# Altium PCB GATEWAY_PCB.PcbDoc (part 1 of 2)
Units mm, origin at the board's own origin, x right, y up, seen from the top; angles counter-clockwise.
Board outline 96.14 x 95.25 mm, 2 copper layers (Top Layer, Bottom Layer); 203 components, 123 nets, 653 pads, 432 vias.
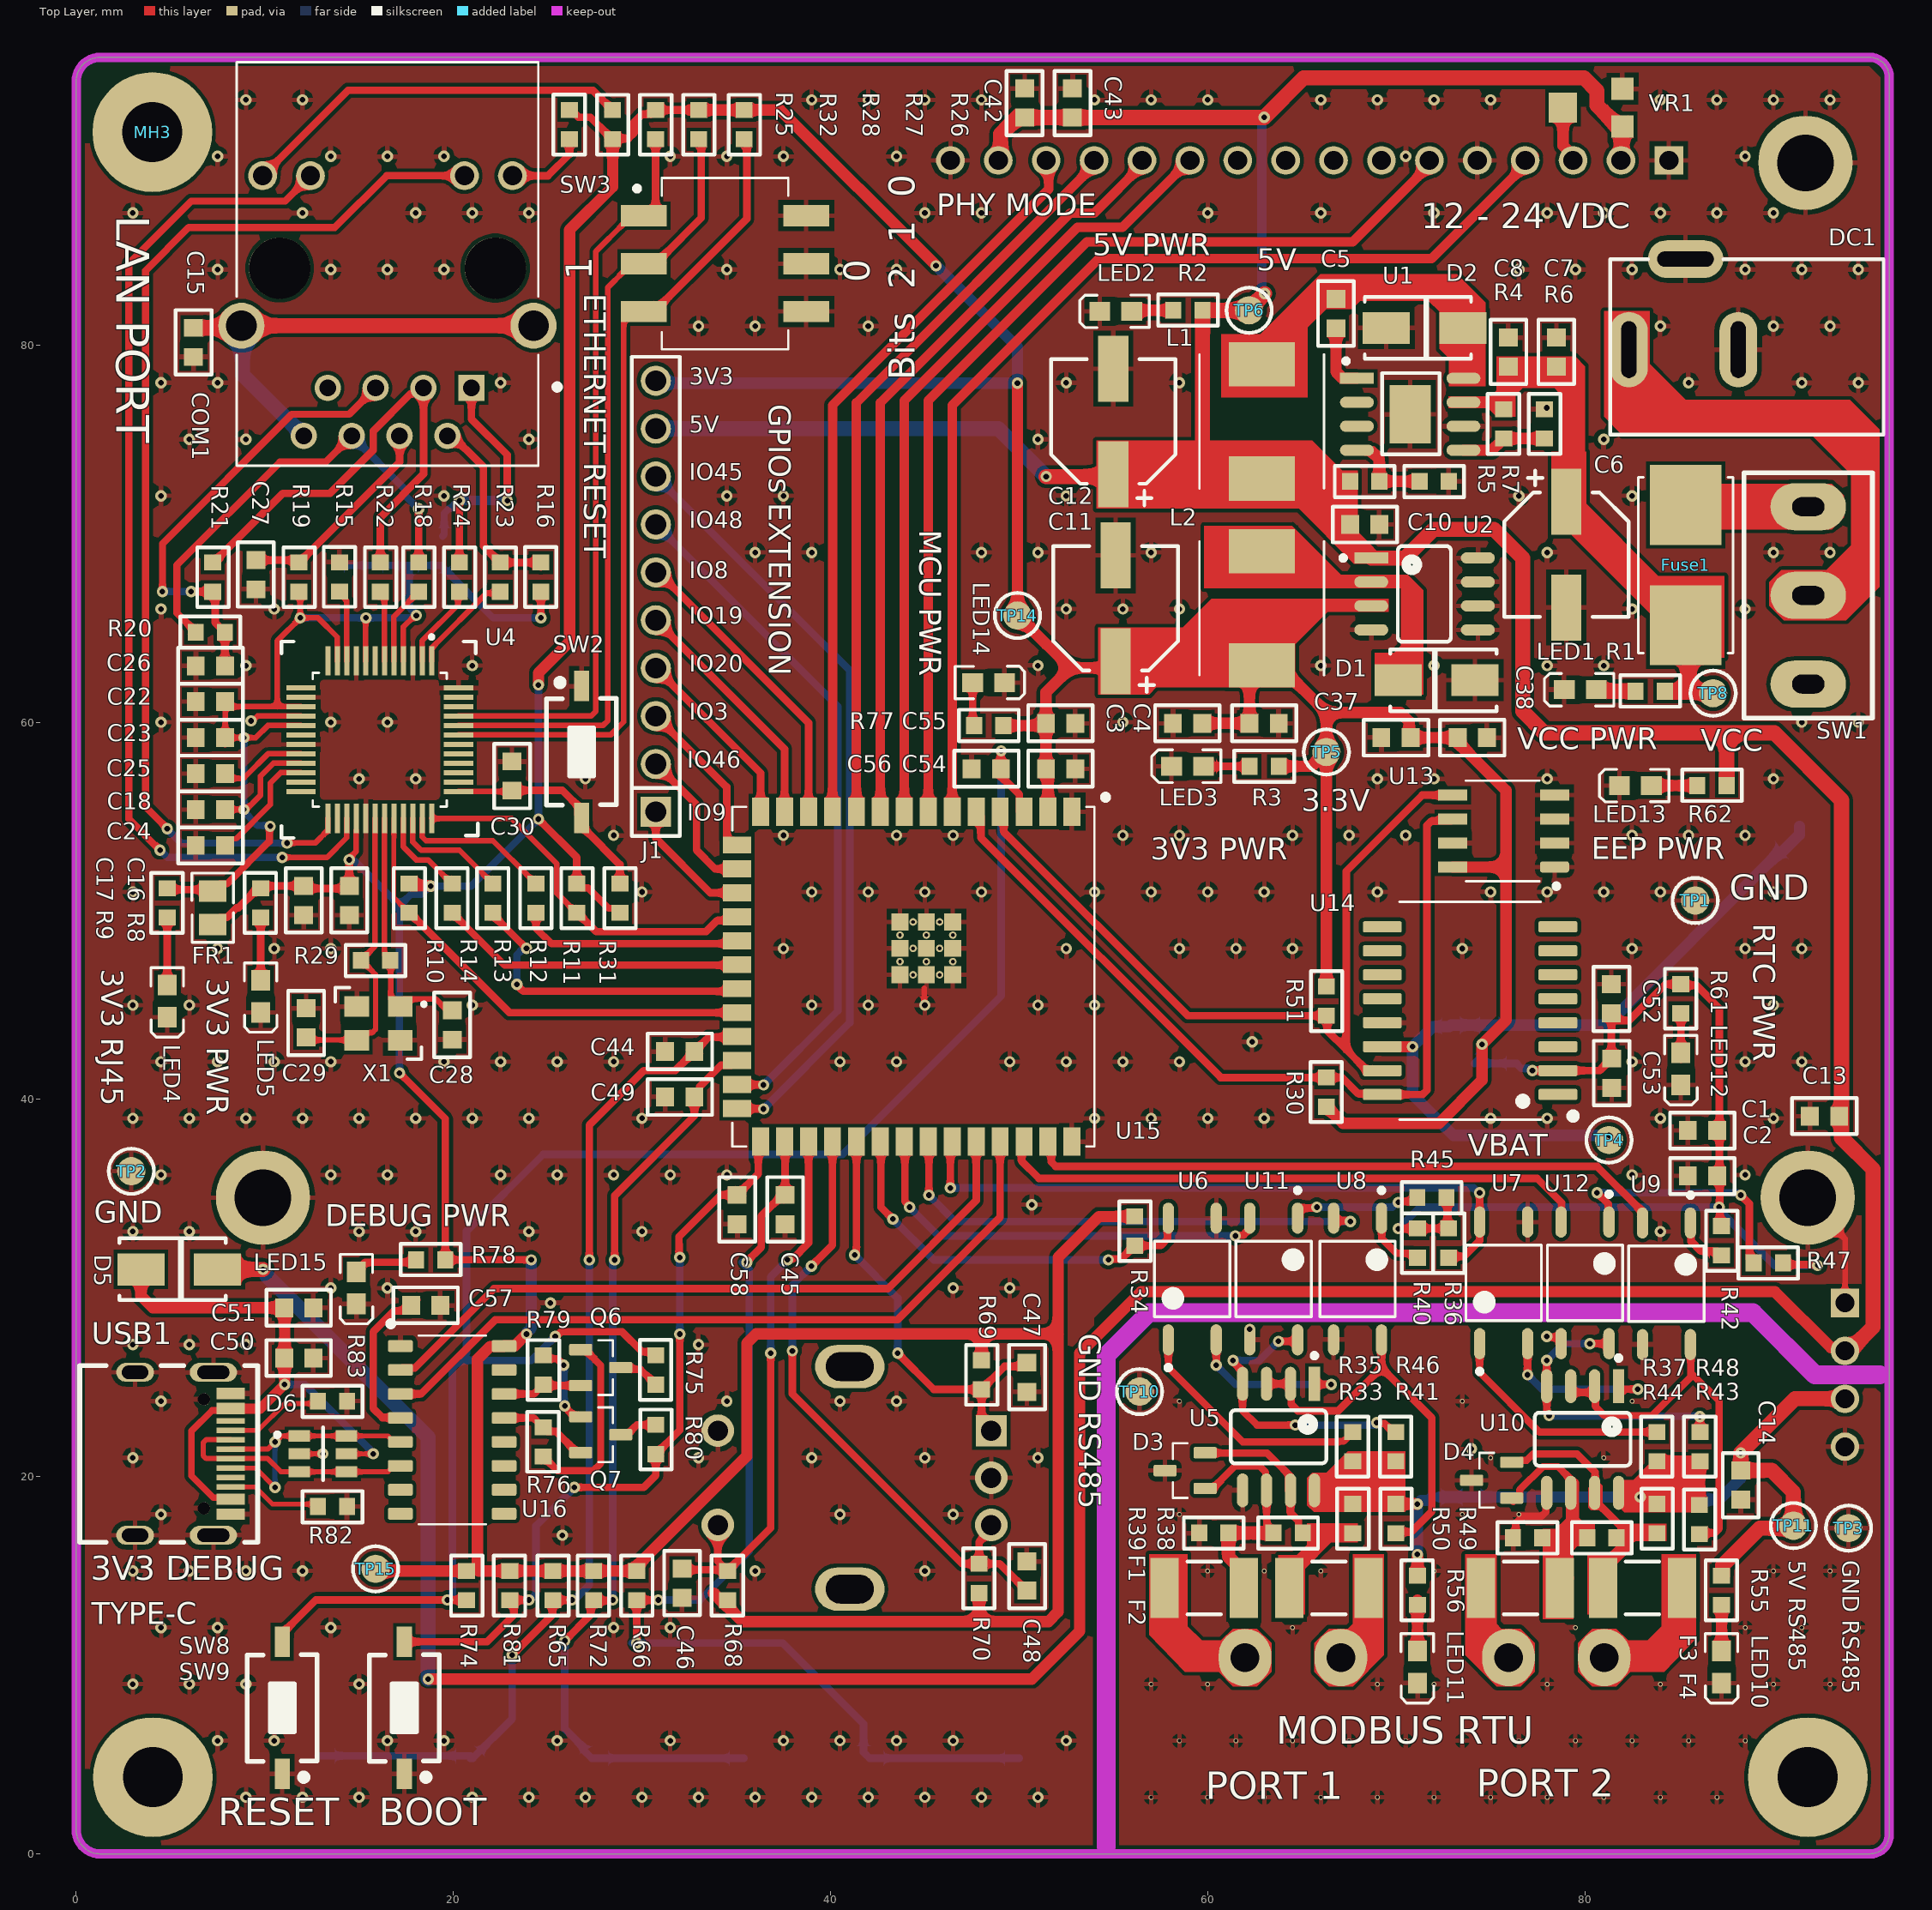
[diagram p0: Top Layer view]
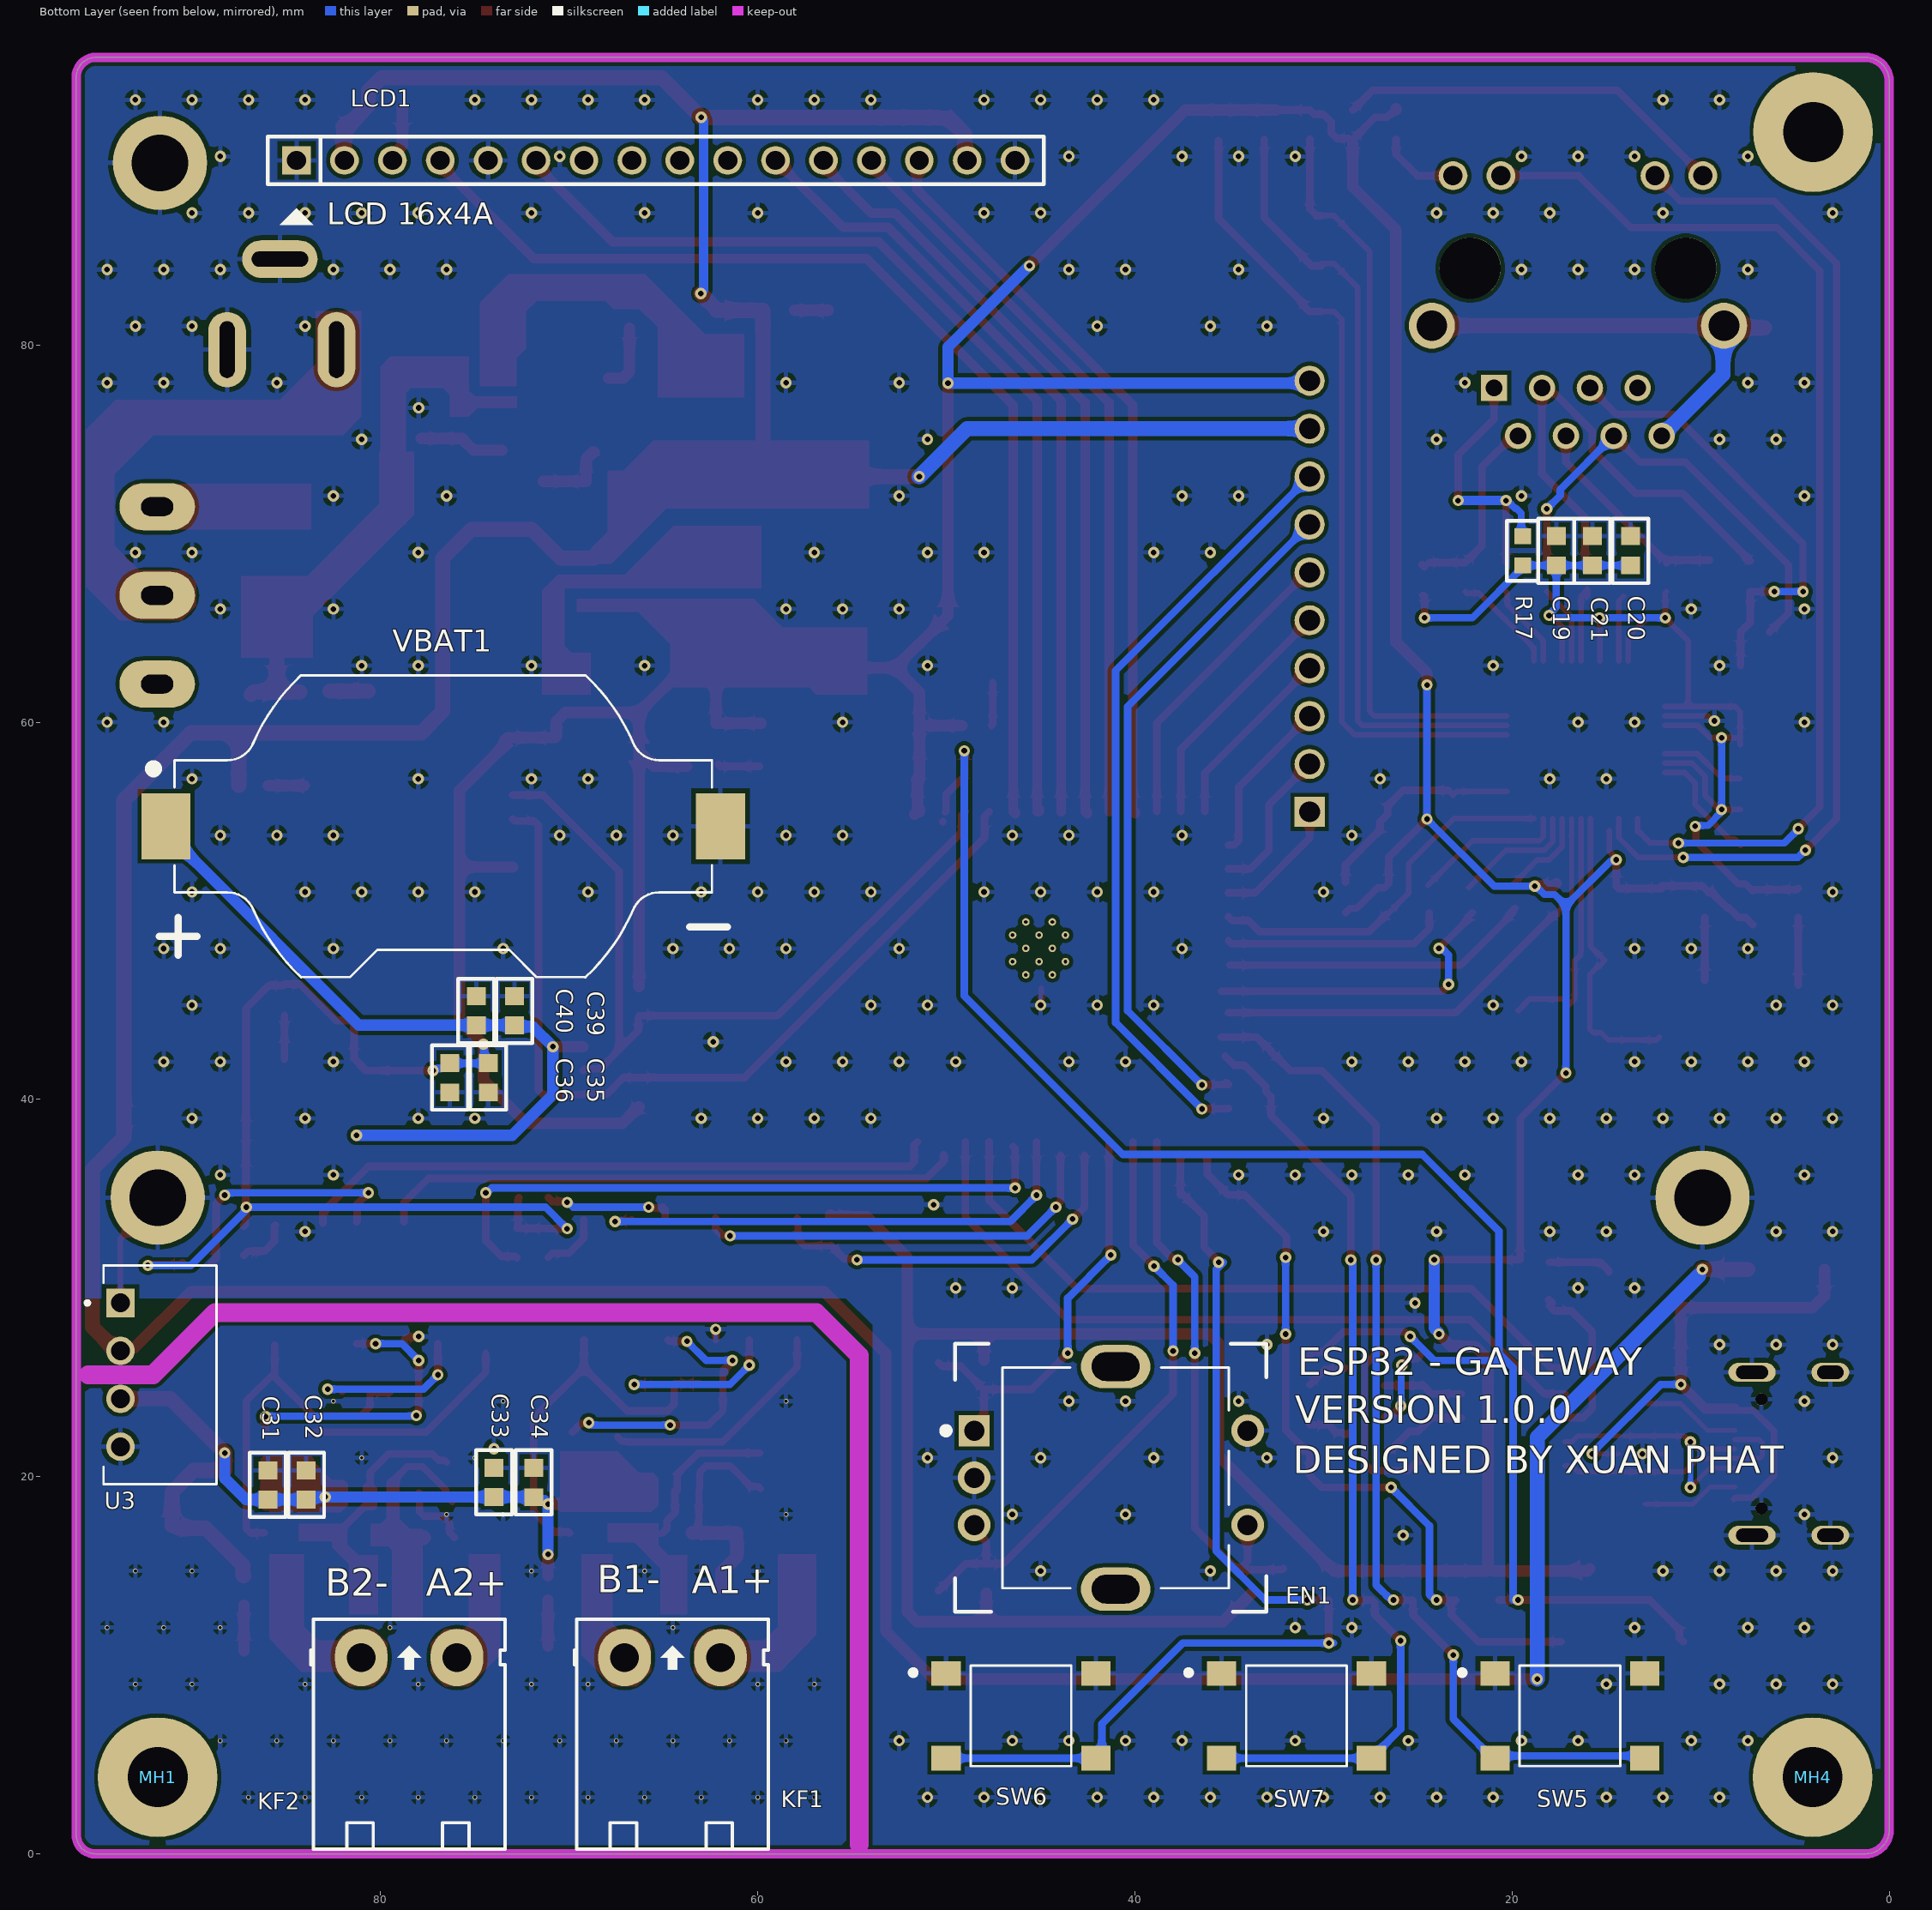
[diagram p1: Bottom Layer view, seen from below]
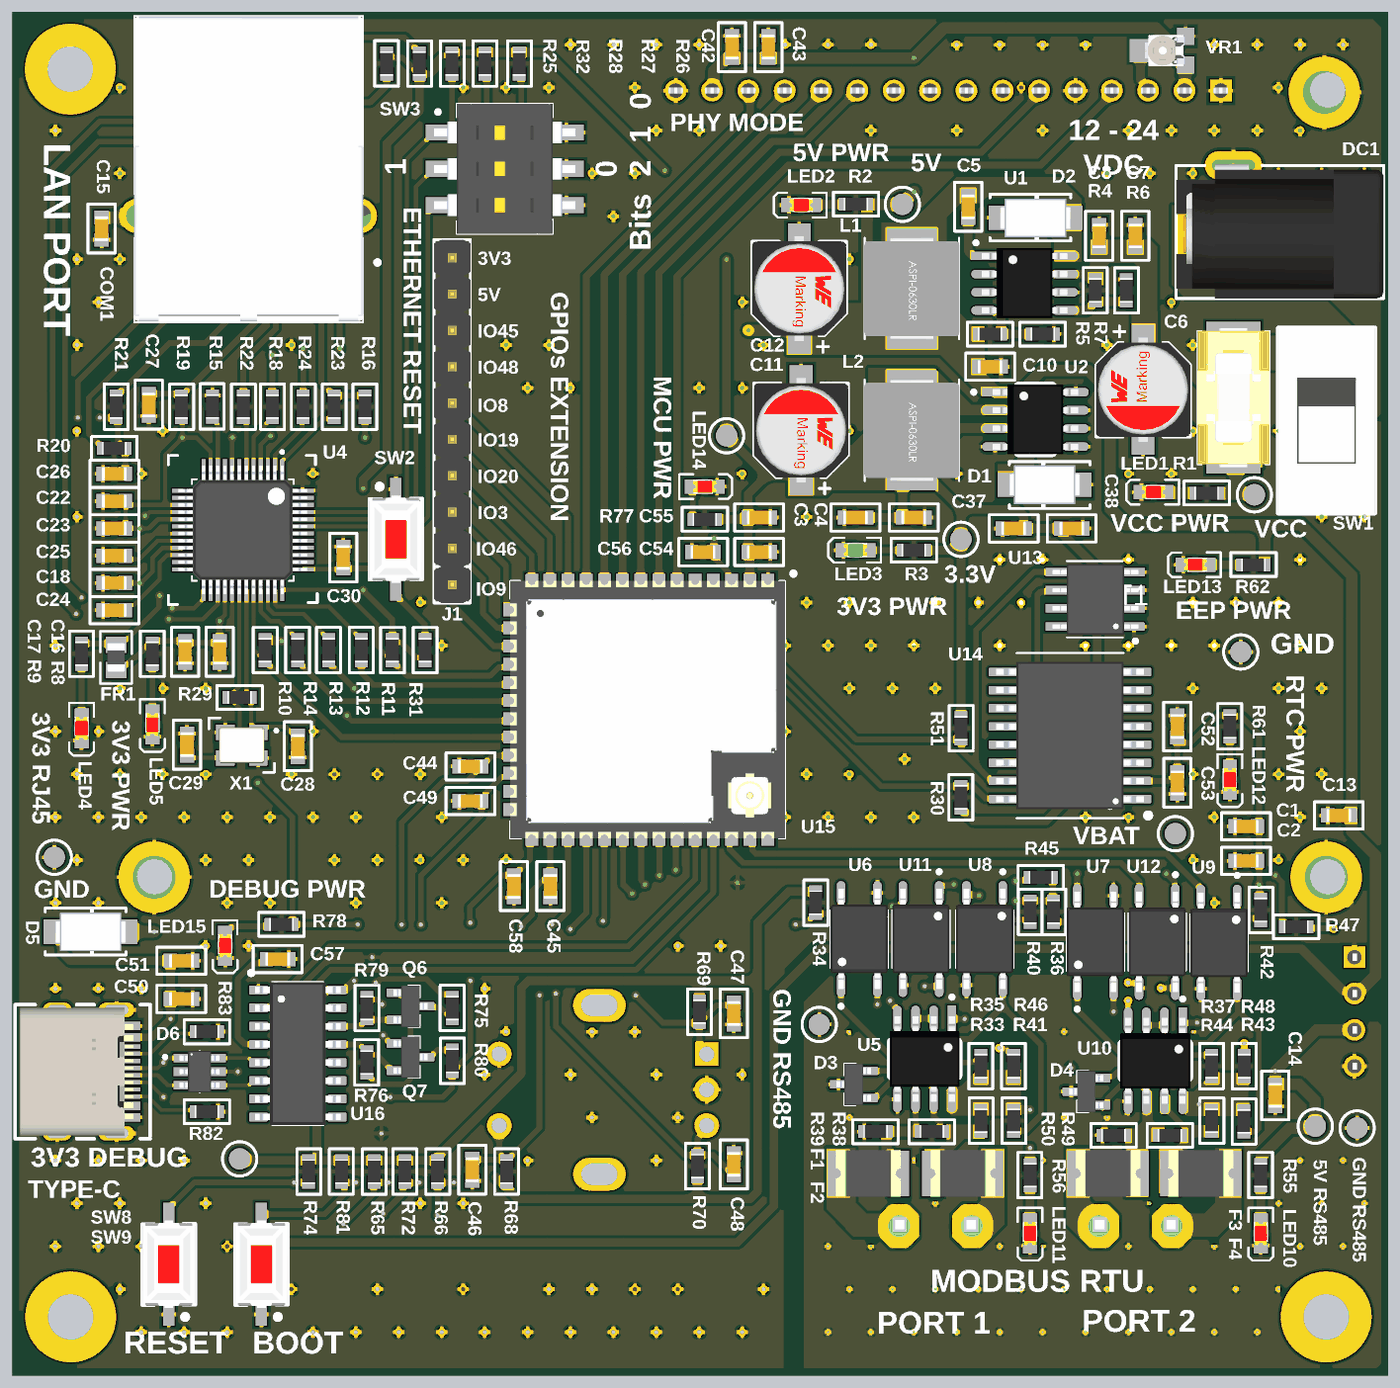
[diagram p3: 3D render of the assembled board from above, using the file's embedded part models]
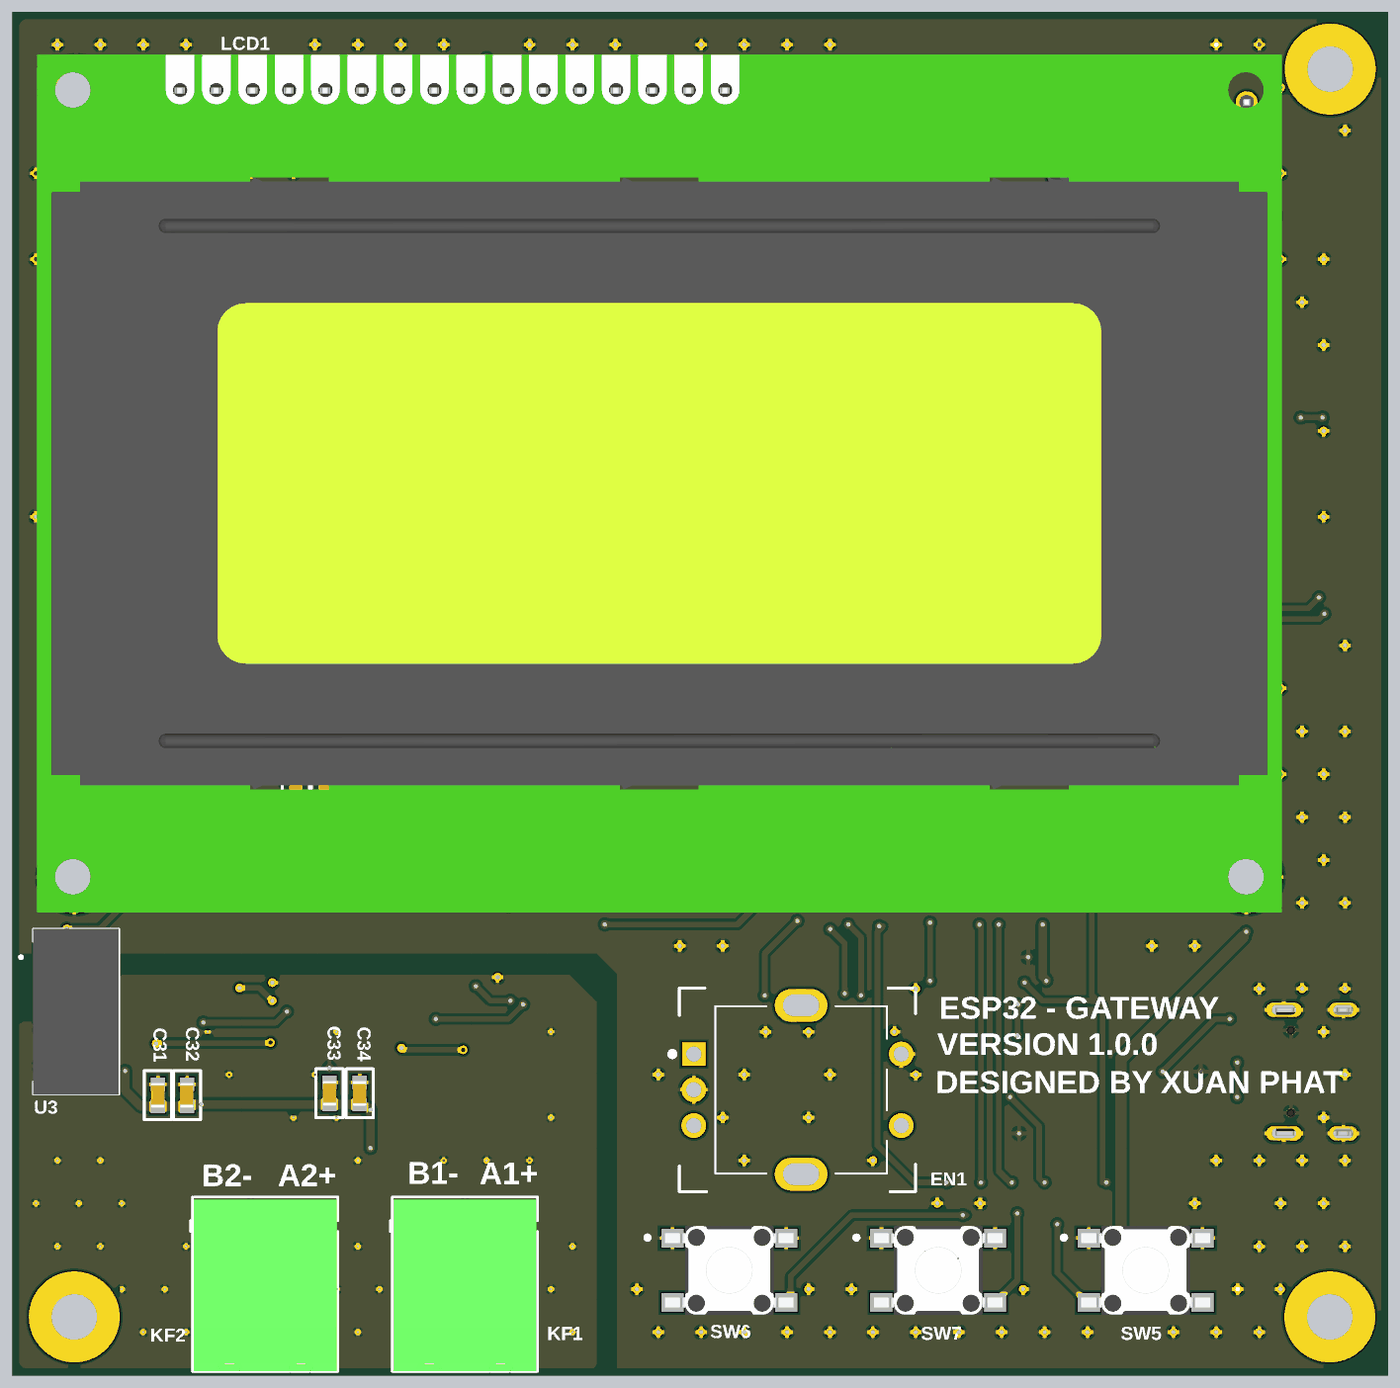
[diagram p4: 3D render of the assembled board from below, using the file's embedded part models]

## Layer stack, top to bottom
Top Solder: solder mask 0.0102, Solder Resist, Dk 3.5
Top Layer: signal copper 0.0356
Dielectric 1: dielectric 0.32, FR-4, Dk 4.8
Bottom Layer: signal copper 0.0356
Bottom Solder: solder mask 0.0102, Solder Resist, Dk 3.5

## Board outline
0,1.27 0,93.98 cw(c1.27,93.98) 1.27,95.25 95.097,95.25 cw(c95.097,94.208) 96.139,94.208 96.139,1.016 cw(c95.123,1.016) 95.123,0 1.27,0 cw(c1.27,1.27)

## Design rules (kind name [scope] priority, off if disabled: settings)
Clearance [All] p1: gap=0.203 ignorepadtopadclearanceinfootprint=TRUE
DiffPairsRouting [All] p1: maxlimit=0.254 minlimit=0.254 mostfreqgap=0.254 toplayer_minwidth=0.254 toplayer_maxwidth=0.381 toplayer_prefwidth=0.381 bottomlayer_minwidth=0.254 bottomlayer_maxwidth=0.381 bottomlayer_prefwidth=0.381 maxuncoupledlength=12.7
PolygonConnect [All] p1: connectstyle=Relief reliefconductorwidth=0.254 reliefentries=4 polygonreliefangle="90 Angle" airgapwidth=0.254
RoutingVias [All] p1: holewidth=0.3 width=0.6 viastyle="Through Hole" minholewidth=0.3 minwidth=0.6 maxholewidth=0.8 maxwidth=1
SolderMaskExpansion [All] p1: expansion=0.102 istentingtop=FALSE
SupplyNets "Schematic Supply Nets_10" [InNet('+VCC')] p1: voltage=0.000
SupplyNets "Schematic Supply Nets_9" [InNet('+5V_RS485')] p2: voltage=0.000
SupplyNets "Schematic Supply Nets_8" [InNet('+3.3V')] p3: voltage=0.000
SupplyNets "Schematic Supply Nets_5" [InNet('GND')] p4: voltage=0.000
SupplyNets "Schematic Supply Nets" [InNet('+5V')] p5: voltage=0.000
SupplyNets "Schematic Supply Nets_7" [InNet('+3.3V_RJ45')] p6: voltage=0.000
SupplyNets "Schematic Supply Nets_6" [InNet('VBAT')] p7: voltage=0.000
SupplyNets "Schematic Supply Nets_4" [InNet('VBUS')] p8: voltage=0.000
SupplyNets "Schematic Supply Nets_2" [InNet('GND_RS485')] p9: voltage=0.000
SupplyNets "Schematic Supply Nets_1" [InNet('GND_RJ45')] p10: voltage=0.000
UnRoutedNet [All] p1: checkbadconnections=TRUE
Width [All] p1: maxlimit=1.5 minlimit=0.25 preferedwidth=0.4
28 further rules are at their usual default settings.

## Classes and differential pairs
component class User_Interface: C42 C43 C44 C45 C46 C47 C48 C49 EN1 LCD1 R65 R66 R68 R69 R70 R72 SW5 SW6 SW7 VR1
component class RTC_and_EEPROM: C35 C36 C37 C38 C39 C40 LED12 LED13 MH1 MH3 MH4 R30 R51 R61 R62 U13 U14
component class RS485_Port: C31 C32 C33 C34 D3 D4 F1 F2 F3 F4 KF1 KF2 LED10 LED11 R33 R34 R35 R36 R37 R38 R39 R40 R41 R42 R43 R44 R45 R46 R47 R48 R49 R50 R55 R56 TP10 TP11 U5 U6 U7 U8 U9 U10 U11 U12
component class Power_Supply: C1 C2 C3 C4 C5 C6 C7 C8 C10 C11 C12 C13 C14 D1 D2 DC1 Fuse1 L1 L2 LED1 LED2 LED3 R1 R2 R3 R4 R5 R6 R7 SW1 TP1 TP2 TP3 TP4 TP5 TP6 TP8 U1 U2 U3 VBAT1 VCC
component class MCU: C50 C51 C52 C53 C54 C55 C56 C57 C58 D5 D6 J1 LED14 LED15 Q6 Q7 R74 R75 R76 R77 R78 R79 R80 R81 R82 R83 SW8 SW9 TP14 TP15 U15 U16 USB1
component class Ethernet: C15 C16 C17 C18 C19 C20 C21 C22 C23 C24 C25 C26 C27 C28 C29 C30 COM1 FR1 LED4 LED5 R8 R9 R10 R11 R12 R13 R14 R15 R16 R17 R18 R19 R20 R21 R22 R23 R24 R25 R26 R27 R28 R29 R31 R32 SW2 SW3 U4 X1
differential pair DATA_D: +DATA_D_P -DATA_D_N

## Components (designator, comment, footprint, x,y, rotation, side; value= is the part's Value field where it differs from the comment)
C1 "10uF/50V" "CAP - 0603" 86.233,38.354 r180 top
C2 "0.1uF/50V" "CAP - 0603" 86.233,35.941 r180 top
C3 "10uF/50V" "CAP - 0603" 58.928,59.944 r180 top
C4 "0.1uF/50V" "CAP - 0603" 62.992,59.944 r0 top
C5 "10nF/50V" "CAP - 0603" 66.802,81.661 r90 top
C6 "100uF/35V" ALU_CAP_6.3_7.7 79.019,68.885 r270 top
C7 "4.7uF/50V" "CAP - 0603" 78.486,79.629 r90 top
C8 "4.7uF/50V" "CAP - 0603" 75.946,79.629 r90 top
C10 "10uF/50V" "CAP - 0603" 68.326,70.485 r0 top
C11 "330uF/6.3V" ALU_CAP_6.3_7.7 55.118,66.04 r90 top
C12 "220uF/16V" ALU_CAP_6.3_7.7 54.991,75.946 r90 top
C13 "4.7uF/50V" "CAP - 0603" 92.71,39.116 r180 top
C14 "10uF/50V" "CAP - 0603" 88.265,19.558 r270 top
C15 "1nF/50V" "CAP - 0603" 6.223,80.137 r90 top
C16 "10uF/50V" "CAP - 0603" 14.478,50.546 r90 top
C17 "100nF/50V" "CAP - 0603" 12.065,50.546 r90 top
C18 "100nF/50V" "CAP - 0603" 7.112,55.372 r0 top
C19 "100nF/50V" "CAP - 0603" 17.653,69.088 r270 bottom
C20 "100nF/50V" "CAP - 0603" 13.716,69.088 r270 bottom
C21 "100nF/50V" "CAP - 0603" 15.748,69.088 r270 bottom
C22 "100nF/50V" "CAP - 0603" 7.112,61.087 r0 top
C23 "100nF/50V" "CAP - 0603" 7.112,59.182 r0 top
C24 "10nF/50V" "CAP - 0603" 7.112,53.467 r0 top
C25 "4.7uF/50V" "CAP - 0603" 7.112,57.277 r0 top
C26 "10nF/50V" "CAP - 0603" 7.112,62.992 r0 top
C27 "22nF/50V" "CAP - 0603" 9.525,67.818 r90 top
C28 "18pF/50V" "CAP - 0603" 19.939,43.942 r90 top
C29 "18pF/50V" "CAP - 0603" 12.192,44.069 r270 top
C30 "0.1uF/50V" "CAP - 0603" 23.114,57.15 r270 top
C31 "0.1uF/50V" "CAP - 0603" 85.979,19.558 r90 bottom
C32 "0.1uF/50V" "CAP - 0603" 83.947,19.558 r90 bottom
C33 "0.1uF/50V" "CAP - 0603" 73.986,19.697 r90 bottom
C34 "0.1uF/50V" "CAP - 0603" 71.882,19.685 r90 bottom
C35 "10uF/50V" "CAP - 0603" 74.295,41.148 r90 bottom
C36 "0.1uF/50V" "CAP - 0603" 76.327,41.148 r90 bottom
C37 "10uF/50V" "CAP - 0603" 69.977,59.182 r0 top
C38 "0.1uF/50V" "CAP - 0603" 74.041,59.182 r180 top
C39 "10uF/50V" "CAP - 0603" 72.898,44.704 r270 bottom
C40 "0.1uF/50V" "CAP - 0603" 74.93,44.704 r270 bottom
C42 "10uF/50V" "CAP - 0603" 50.292,92.837 r270 top
C43 "0.1uF/50V" "CAP - 0603" 52.832,92.837 r270 top
C44 "0.1uF/50V" "CAP - 0603" 32.004,42.545 r0 top
C45 "0.1uF/50V" "CAP - 0603" 37.592,34.163 r90 top
C46 "0.1uF/50V" "CAP - 0603" 32.131,14.351 r90 top
C47 "0.1uF/50V" "CAP - 0603" 50.419,25.273 r90 top
C48 "0.1uF/50V" "CAP - 0603" 50.419,14.732 r270 top
C49 "0.1uF/50V" "CAP - 0603" 32.004,40.132 r0 top
C50 "0.1uF/50V" "CAP - 0603" 11.811,26.289 r180 top
C51 "10uF/50V" "CAP - 0603" 11.811,28.956 r180 top
C52 "10uF/50V" "CAP - 0603" 81.407,45.339 r270 top
C53 "0.1uF/50V" "CAP - 0603" 81.421,41.392 r90 top
C54 "10uF/50V" "CAP - 0603" 52.197,57.531 r180 top
C55 "0.1uF/50V" "CAP - 0603" 52.197,59.944 r180 top
C56 "0.1uF/50V" "CAP - 0603" 48.26,57.531 r0 top
C57 "100nF/50V" "CAP - 0603" 18.542,29.083 r180 top
C58 "0.1uF/50V" "CAP - 0603" 35.052,34.163 r90 top
COM1 "RJ45" RJ45 16.505,84.074 r0 top
D1 "SS54" SS54 72.136,62.23 r180 top
D2 "SS54" SS54 71.501,80.899 r0 top
D3 "SM712-02HTG" SOT23-3 58.801,20.32 r180 top
D4 "SM712-02HTG" SOT23-3 75.057,19.812 r180 top
D5 "SS54" SS54 5.461,30.988 r0 top
D6 "SRV05-4" SOT-23-6 13.081,21.209 r0 top
DC1 "Jack_DC" "DC_5.5 x 2.1mm" 85.238,79.756 r180 top
EN1 "Encoder - EC11" "ENCODER - EC11" 41.021,19.939 r180 bottom
F1 "MF-MSMF020-2" "FUSE 4.55X3.24 MM" 66.421,14.097 r0 top
F2 "MF-MSMF020-2" "FUSE 4.55X3.24 MM" 59.817,14.097 r180 top
F3 "MF-MSMF020-2" "FUSE 4.55X3.24 MM" 83.058,14.097 r0 top
F4 "MF-MSMF020-2" "FUSE 4.55X3.24 MM" 76.581,14.097 r180 top
FR1 "120R" FR-0805 7.239,50.165 r90 top
Fuse1 "Fuse - 4A" SMD-2 85.344,68.326 r270 top
J1 "Jump 10 Pins" JPx1-10pins-2.54mm 30.734,55.245 r90 top
KF1 "KF 2 Pins" KF-5.08-2-R 67.056,10.414 r180 bottom
KF2 "KF 2 Pins" KF-5.08-2-R 81.026,10.414 r180 bottom
L1 "15uH/3A" L_SMD_0630 62.865,75.946 r270 top
L2 "22uH/3A" L_SMD_0630 62.865,66.04 r270 top
LCD1 "LCD 16x4A" LCD-16X4A-2-HOLES 91.821,89.535 r180 bottom locked
LED1 "RED" RED_LED_0603 79.756,61.722 r180 top
LED2 "RED" RED_LED_0603 55.118,81.788 r180 top
LED3 "GREEN" GREEN_LED_0603 58.928,57.658 r180 top
LED4 "RED" RED_LED_0603 4.826,45.212 r270 top
LED5 "RED" RED_LED_0603 9.779,45.466 r270 top
LED10 "RED" RED_LED_0603 87.249,9.906 r270 top
LED11 "RED" RED_LED_0603 71.12,9.906 r270 top
LED12 "RED" RED_LED_0603 85.091,41.619 r270 top
LED13 "RED" RED_LED_0603 82.677,56.642 r180 top
LED14 "RED_MCU" RED_LED_0603 48.387,62.103 r0 top
LED15 "RED_DEBUG" RED_LED_0603 14.858,30.009 r270 top
MH1 "MOUNTING HOLE" "Mounting hole_2" 91.796,4.089 r180 bottom
MH3 "MOUNTING HOLE" "Mounting hole_2" 4.064,91.313 r0 top
MH4 "MOUNTING HOLE" "Mounting hole_2" 4.039,4.089 r180 bottom
Q6 "SS8050" SOT23-3 27.813,25.781 r0 top
Q7 "SS8050" SOT23-3 27.813,22.225 r0 top
R1 "10K/1%" "RES - 0603" 83.464,61.646 r180 top
R2 "1K/1%" "RES - 0603" 58.953,81.839 r180 top
R3 "330R/1%" "RES - 0603" 62.992,57.658 r180 top
R4 "10K/1%" "RES - 0603" 75.692,75.819 r270 top
R5 "1K/1%" "RES - 0603" 68.326,72.771 r0 top
R6 "1.5K/1%" "RES - 0603" 77.851,75.819 r90 top
R7 "330R/1%" "RES - 0603" 72.009,72.771 r0 top
R8 "330R/1%" "RES - 0603" 4.826,50.419 r270 top
R9 "330R/1%" "RES - 0603" 9.779,50.419 r270 top
R10 "10K/1%" "RES - 0603" 17.653,50.673 r90 top
R11 "10K/1%" "RES - 0603" 26.543,50.673 r90 top
R12 "22R/1%" "RES - 0603" 24.384,50.673 r270 top
R13 "22R/1%" "RES - 0603" 22.098,50.673 r270 top
R14 "22R/1%" "RES - 0603" 19.939,50.673 r270 top
R15 "12.4K/1%" "RES - 0603" 13.97,67.704 r270 top
R16 "49.9R/1%" "RES - 0603" 24.638,67.691 r270 top
R17 "49.9R/1%" "RES - 0603" 19.431,69.088 r270 bottom
R18 "22R/1%" "RES - 0603" 18.161,67.691 r90 top
R19 "22R/1%" "RES - 0603" 11.811,67.691 r90 top
R20 "49.9R/1%" "RES - 0603" 7.112,64.77 r180 top
R21 "49.9R/1%" "RES - 0603" 7.239,67.691 r90 top
R22 "22R/1%" "RES - 0603" 16.129,67.691 r90 top
R23 "22R/1%" "RES - 0603" 22.479,67.691 r90 top
R24 "22R/1%" "RES - 0603" 20.32,67.691 r90 top
R25 "330R/1%" "RES - 0603" 26.15,91.682 r270 top
R26 "10K/1%" "RES - 0603" 35.421,91.682 r90 top
R27 "10K/1%" "RES - 0603" 33.008,91.682 r90 top
R28 "10K/1%" "RES - 0603" 30.722,91.682 r90 top
R29 "1M/1%" "RES - 0603" 15.875,47.371 r0 top
R30 "4.7K/1%" "RES - 0603" 66.294,40.386 r270 top
R31 "10K/1%" "RES - 0603" 28.829,50.673 r90 top
R32 "330R/1%" "RES - 0603" 28.436,91.682 r90 top
R33 "2.2K/1%" "RES - 0603" 67.691,17.78 r90 top
R34 "2K/1%" "RES - 0603" 56.134,33.02 r90 top
R35 "1K/1%" "RES - 0603" 67.691,21.59 r270 top
R36 "2K/1%" "RES - 0603" 72.771,32.385 r90 top
R37 "1K/1%" "RES - 0603" 83.82,21.59 r270 top
R38 "120R/1%" "RES - 0603" 64.262,17.018 r0 top
R39 "2.2K/1%" "RES - 0603" 60.325,17.018 r0 top
R40 "330R/1%" "RES - 0603" 71.12,32.385 r90 top
R41 "2K/1%" "RES - 0603" 69.977,17.78 r90 top
R42 "330R/1%" "RES - 0603" 87.249,32.512 r90 top
R43 "2K/1%" "RES - 0603" 86.07,17.728 r90 top
R44 "2.2K/1%" "RES - 0603" 83.82,17.78 r90 top
R45 "330R/1%" "RES - 0603" 71.882,34.798 r0 top
R46 "2K/1%" "RES - 0603" 69.977,21.59 r270 top
R47 "330R/1%" "RES - 0603" 89.725,31.339 r0 top
R48 "2K/1%" "RES - 0603" 86.106,21.59 r270 top
R49 "120R/1%" "RES - 0603" 80.899,16.764 r0 top
R50 "2.2K/1%" "RES - 0603" 76.962,16.764 r0 top
R51 "4.7K/1%" "RES - 0603" 66.294,45.212 r90 top
R55 "1K/1%" "RES - 0603" 87.249,13.97 r270 top
R56 "1K/1%" "RES - 0603" 71.12,13.97 r270 top
R61 "330R/1%" "RES - 0603" 85.09,45.339 r270 top
R62 "1K/1%" "RES - 0603" 86.741,56.642 r180 top
R65 "10K/1%" "RES - 0603" 25.273,14.224 r90 top
R66 "10K/1%" "RES - 0603" 29.718,14.224 r90 top
R68 "10K/1%" "RES - 0603" 34.544,14.224 r270 top
R69 "10K/1%" "RES - 0603" 48.006,25.4 r90 top
R70 "10K/1%" "RES - 0603" 47.879,14.605 r270 top
R72 "10K/1%" "RES - 0603" 27.432,14.224 r270 top
R74 "10K/1%" "RES - 0603" 20.701,14.224 r90 top
R75 "0R/1%" "RES - 0603" 30.734,25.654 r270 top
R76 "10K/1%" "RES - 0603" 24.765,21.844 r270 top
R77 "330R/1%" "RES - 0603" 48.387,59.817 r180 top
R78 "330R/1%" "RES - 0603" 18.796,31.496 r180 top
R79 "10K/1%" "RES - 0603" 24.765,25.654 r90 top
R80 "0R/1%" "RES - 0603" 30.734,21.971 r90 top
R81 "10K/1%" "RES - 0603" 22.987,14.224 r270 top
R82 "5.1K/1%" "RES - 0603" 13.589,18.415 r0 top
R83 "5.1K/1%" "RES - 0603" 13.589,24.003 r0 top
SW1 "Switch" Dip_Switch_3_pins_0 91.846,66.725 r270 top
SW2 "Button 2 Pins" "SMD SWITCH 2 PINS" 26.797,58.42 r270 top
SW3 "DIP Switch 3 Pins" "SMD - SW - 3PINS" 34.405,84.316 r0 top
SW5 "Button 4 Pins" SW-SMD-6X6MM 16.931,7.322 r180 bottom
SW6 "Button 4 Pins" SW-SMD-6X6MM 46.04,7.322 r180 bottom
SW7 "Button 4 Pins" SW-SMD-6X6MM 31.435,7.322 r180 bottom
SW8 "Button 2 Pins" "SMD SWITCH 2 PINS" 10.922,7.747 r90 top
SW9 "Button 2 Pins" "SMD SWITCH 2 PINS" 17.399,7.747 r90 top
TP1 "GND" "TEST POINT" 85.852,50.546 r0 top
TP2 "GND" "TEST POINT" 2.921,36.195 r0 top
TP3 "GND_RS485" "TEST POINT" 93.98,17.272 r0 top
TP4 "VBAT" "TEST POINT" 81.28,37.846 r0 top
TP5 "+3.3V" "TEST POINT" 66.294,58.42 r0 top
TP6 "+5V" "TEST POINT" 62.195,81.839 r0 top
TP8 "+VCC" "TEST POINT" 86.801,61.535 r0 top
TP10 "GND_RS485" "TEST POINT" 56.388,24.511 r90 top
TP11 "GND_RS485" "TEST POINT" 91.059,17.399 r90 top
TP14 "MCU PWR" "TEST POINT" 49.911,65.659 r90 top
TP15 "DEBUG PWR" "TEST POINT" 15.875,15.113 r90 top
U1 "TPS5430" TPS5430 70.764,76.352 r0 top
U2 "XL1509" SOP_8 71.501,66.802 r0 top
U3 "B0505S/1W" B0505S/1W 91.694,25.4 r270 bottom
U4 "W5500" LQFP-48 16.096,59.073 r270 top
U5 "MAX485ESA" SOP_8 63.754,22.098 r270 top
U6 "TLP185" SOP-4 59.182,30.48 r90 top
U7 "TLP185" SOP-4 75.692,30.276 r90 top
U8 "TLP185" SOP-4 67.945,30.48 r270 top
U9 "TLP185" SOP-4 84.328,30.226 r270 top
U10 "MAX485ESA" SOP_8 79.883,21.971 r270 top
U11 "TLP185" SOP-4 63.5,30.48 r270 top
U12 "TLP185" SOP-4 80.01,30.276 r270 top
U13 "AT24C256C" SOIC-8 75.692,54.229 r180 top
U14 "DS3231SN#" "SOIC -16" 73.914,44.704 r180 top
U15 "ESP32-S3-WROOM-1U-N8R2" ESP32-S3-WROOM-1U-N8R2 52.802,55.259 r270 top
U16 "CH340C" SOIC127P600X180-16N 19.939,22.479 r0 top
USB1 "USB Type C" Type-C-16Pins 4.191,21.209 r270 top
VBAT1 "3V" "CR2032 - SMD" 76.676,54.483 r180 bottom locked
VR1 "20K" "VR 3X3" 80.391,92.583 r90 top
X1 "CRYSTAL 8MHz" "CRYSTAL - 3.2 X 2.5 MM" 16.024,44.031 r180 top

## Footprints (in the part's own frame and the unit in brackets; to place one, negate y for a bottom-side part, rotate by r counter-clockwise, add the part's x,y. Pads: shape width x height; smd on the part's side, far side on the other; paste and mask are expansions set on the pad)
ALU_CAP_6.3_7.7 [mm] "6.3x7.7mm"
  rect 3.5x1.6 smd: 1(-2.8,0) 2(2.8,0)
  silkscreen extent -4.44,-3.3 3.3,3.3, body extent -3.65,-3.3 3.65,3.3, height 7.65
B0505S/1W [mm]
  rect 1.508x1.508 / inner round 1.508 / far side rect 1.508x1.508 hole 1: 1(-3.81,-2.1)
  round 1.508 hole 1: 2(-1.27,-2.1) 3(1.27,-2.1) 4(3.81,-2.1)
  silkscreen extent -5.8,-3.95 5.8,3, body extent -5.8,-3.01 5.8,2.99, height 10.16
"CAP - 0603" [mm] "Capacitor SMD - 1608 - KEMET"
  rect 0.95x1 smd: 1(-0.775,0) 2(0.775,0)
  silkscreen extent -1.7,-0.95 1.72,0.95, body extent -0.87,-0.48 0.87,0.48, height 1
"CR2032 - SMD" [mm] "SMD"
  rect 2.6x3.5 smd: N(14.7,0) P(-14.7,0)
  silkscreen extent -15.42,-8.01 15.06,8.01, body extent -15.65,-8 15.65,8, height 5.55
"CRYSTAL - 3.2 X 2.5 MM" [mm] "SMD"
  rect 1.3x1.1 smd: 1(-1.15,-0.9) 2(1.15,-0.9) 3(1.15,0.9) 4(-1.15,0.9)
  silkscreen extent -2.51,-1.9 2.29,1.9, body extent -1.6,-1.25 1.6,1.25, height 0.8
"DC_5.5 x 2.1mm" [mm]
  oval 2x4 hole 0.8 slot 3 at 90 deg: 1(2.9,0) 2(-2.9,0)
  oval 4x2 hole 0.8 slot 3 at 0 deg: 3(-0.1,-4.8)
  silkscreen extent -10.6,-4.8 3.9,4.5, body extent -10.6,-4.9 3.9,4.5, height 10.7
Dip_Switch_3_pins_0 [mm]
  oval 2.5x4 hole 1 slot 1.7 at 90 deg: 1(-4.7,0) 2(0,0) 3(4.7,0)
  silkscreen extent -6.5,-3.4 6.5,3.4, body extent -6.5,-3.4 6.5,3.4, height 10.76
"ENCODER - EC11" [mil]
  rect 65x65 / inner round 65 / far side rect 65x65 hole 42: A(-295.28,98.43)
  round 68 hole 42: B(-295.28,-98.43) C(-295.28,0) D(275.59,98.43) E(275.59,-98.43)
  oval 145x90 hole 60 slot 100 at 0 deg: SH1(0,232.28) SH2(0,-232.28)
  silkscreen extent -358,-280 315,280, body extent -303,-276 283,276, height 834
ESP32-S3-WROOM-1U-N8R2 [mm] "SMD"
  rect 1.5x0.9 smd: 1(0,0) 2(0,-1.27) 3(0,-2.54) 4(0,-3.81) 5(0,-5.08) 6(0,-6.35) 7(0,-7.62) 8(0,-8.89) 9(0,-10.16) 10(0,-11.43) 11(0,-12.7) 12(0,-13.97) 13(0,-15.24) 14(0,-16.51) 27(17.5,-16.51) 28(17.5,-15.24) 29(17.5,-13.97) 30(17.5,-12.7) 31(17.5,-11.43) 32(17.5,-10.16) 33(17.5,-8.89) 34(17.5,-7.62) 35(17.5,-6.35) 36(17.5,-5.08) 37(17.5,-3.81) 38(17.5,-2.54) 39(17.5,-1.27) 40(17.5,0)
  rect 0.9x1.5 smd: 15(1.765,-17.76) 16(3.035,-17.76) 17(4.305,-17.76) 18(5.575,-17.76) 19(6.845,-17.76) 20(8.115,-17.76) 21(9.385,-17.76) 22(10.655,-17.76) 23(11.925,-17.76) 24(13.195,-17.76) 25(14.465,-17.76) 26(15.735,-17.76)
  rect 0.9x0.9 smd: 41_1(5.85,-6.32) 41_2(7.25,-6.32) 41_3(8.65,-6.32) 41_4(5.85,-7.72) 41_5(7.25,-7.72) 41_6(8.65,-7.72) 41_7(5.85,-9.12) 41_8(7.25,-9.12) 41_9(8.65,-9.12)
  round 0.4 hole 0.2 mask+0: 41_10(6.55,-6.32) 41_11(7.95,-6.32) 41_12(5.85,-7.02) 41_13(7.25,-7.02) 41_14(8.65,-7.02) 41_15(6.55,-7.72) 41_16(7.95,-7.72) 41_17(5.85,-8.42) 41_18(7.25,-8.42) 41_19(8.65,-8.42) 41_20(6.55,-9.12) 41_21(7.95,-9.12)
  silkscreen extent -0.86,-18.01 17.75,1.88, body extent -0.25,-18.01 17.75,1.19, height 3.35
FR-0805 [mm] "SMD"
  rect 1.14x1.47 smd: 1(-0.89,0) 2(0.89,0)
  silkscreen extent -1.84,-1.1 1.83,1.1, body extent -1,-0.63 1,0.63, height 1.05
"FUSE 4.55X3.24 MM" [mm]
  rect 1.5x3.2 smd: 1(-2.1,0) 2(2.1,0)
  silkscreen extent -0.89,-1.4 0.89,1.4, body extent -2.27,-1.62 2.27,1.62, height 0.85
GREEN_LED_0603 [mm] "SMD"
  rect 1.1x1 smd mask+0.1: 1(-0.853,-0.002) 2(0.847,-0.002)
  silkscreen extent -1.78,-0.88 1.91,0.86, body extent -0.81,-0.51 0.81,0.49, height 0.98
JPx1-10pins-2.54mm [mm] "DIP"
  rect 1.6x1.6 hole 1.1: 1(0,0)
  round 1.6 hole 1.1: 2(2.54,0) 3(5.08,0) 4(7.62,0) 5(10.16,0) 6(12.7,0) 7(15.24,0) 8(17.78,0) 9(20.32,0) 10(22.86,0)
  silkscreen extent -1.27,-1.27 24.13,1.27, body extent -1.27,-1.27 24.13,1.27, height 8.54
KF-5.08-2-R [mil]
  oval 110x120 hole 60: 1(0,0) 2(200,0)
  silkscreen extent -105,-400 300,80, body extent -97,-399 297,73, height 334
L_SMD_0630 [mm] "SMD"
  rect 2.35x3.5 smd: 1(-3.025,0) 2(3.025,0)
  silkscreen extent -3.55,-3.3 3.55,3.3, body extent -3.6,-3.32 3.6,3.32, height 3.03
LCD-16X4A-2-HOLES [mm] "DIP"
  round 5 hole 3: 1(0,-54.737) 1(0.127,0.127) 1(81.915,-54.737)
  rect 1.52x1.52 hole 1.02: 1(7.366,0.254)
  round 1.52 hole 1.02: 2(9.906,0.254) 3(12.446,0.254) 4(14.986,0.254) 5(17.526,0.254) 6(20.066,0.254) 7(22.606,0.254) 8(25.146,0.254) 9(27.686,0.254) 10(30.226,0.254) 11(32.766,0.254) 12(35.306,0.254) 13(37.846,0.254) 14(40.386,0.254) 15(42.926,0.254) 16(45.466,0.254)
  silkscreen extent 5.85,-3.18 46.99,1.52, body extent -2.61,-57.21 84.39,2.79, height 19.59
LQFP-48 [mm]
  rect 1.56x0.28 smd: 1(-4.18,2.75) 2(-4.18,2.25) 3(-4.18,1.75) 4(-4.18,1.25) 5(-4.18,0.75) 6(-4.18,0.25) 7(-4.18,-0.25) 8(-4.18,-0.75) 9(-4.18,-1.25) 10(-4.18,-1.75) 11(-4.18,-2.25) 12(-4.18,-2.75) 25(4.18,-2.75) 26(4.18,-2.25) 27(4.18,-1.75) 28(4.18,-1.25) 29(4.18,-0.75) 30(4.18,-0.25) 31(4.18,0.25) 32(4.18,0.75) 33(4.18,1.25) 34(4.18,1.75) 35(4.18,2.25) 36(4.18,2.75)
  rect 0.28x1.56 smd: 13(-2.75,-4.18) 14(-2.25,-4.18) 15(-1.75,-4.18) 16(-1.25,-4.18) 17(-0.75,-4.18) 18(-0.25,-4.18) 19(0.25,-4.18) 20(0.75,-4.18) 21(1.25,-4.18) 22(1.75,-4.18) 23(2.25,-4.18) 24(2.75,-4.18) 37(2.75,4.18) 38(2.25,4.18) 39(1.75,4.18) 40(1.25,4.18) 41(0.75,4.18) 42(0.25,4.18) 43(-0.25,4.18) 44(-0.75,4.18) 45(-1.25,4.18) 46(-1.75,4.18) 47(-2.25,4.18) 48(-2.75,4.18)
  silkscreen extent -5.55,-5.21 5.21,5.21, body extent -4.5,-4.5 4.5,4.5, height 1.6
"Mounting hole_2" [mil]
  round 250 hole 125.2: 1(-1,-1)
RED_LED_0603 [mm] "SMD"
  rect 1.1x1 smd mask+0.1: 1(-0.852,0.001) 2(0.848,0.001)
  silkscreen extent -1.78,-0.87 1.91,0.87, body extent -0.81,-0.5 0.81,0.5, height 0.98
"RES - 0603" [mm] "Resistor SMD - 1.6x0.8mm - YAGEO"
  rect 0.85x0.9 smd: 1(-0.775,0) 2(0.775,0)
  silkscreen extent -1.59,-0.85 1.59,0.82, body extent -0.85,-0.45 0.85,0.45, height 0.55
RJ45 [mm]
  rect 1.398x1.398 / inner round 1.398 / far side rect 1.398x1.398 hole 0.89: 1(4.45,-6.35)
  round 1.398 hole 0.89: 2(3.18,-8.89) 3(1.91,-6.35) 4(0.64,-8.89) 5(-0.63,-6.35) 6(-1.9,-8.89) 7(-3.17,-6.35) 8(-4.44,-8.89)
  round 1.53 hole 1.02: 9(6.625,4.9) 10(4.085,4.9) 11(-4.085,4.9) 12(-6.625,4.9)
  round 2.445 hole 1.63: 15(7.745,-3.05) 16(-7.745,-3.05)
  round 3.25 hole 3.25 unplated: ""(-5.715,0) ""(5.715,0)
  silkscreen extent -8,-10.48 9.15,10.92, body extent -8.02,-10.4 8.02,10.9, height 13.5
"SMD - SW - 3PINS" [mm] "Pitch - 2.54mm"
  rect 2.44x1.13 smd: 1(-4.305,2.54) 1_1(4.305,2.54) 2(-4.305,0) 2_1(4.305,0) 3(-4.305,-2.54) 3_1(4.305,-2.54)
  silkscreen extent -4.78,-4.54 3.35,4.54, body extent -4.95,-4.54 4.95,4.54, height 4.2
"SMD SWITCH 2 PINS" [mm] "SMD"
  rect 1.6x0.8 smd: 1(-3.502,0) 2(3.498,0)
  silkscreen extent -3.78,-1.85 2.82,1.85, body extent -3.05,-1.85 3.05,1.85, height 2.5
SMD-2 [mil]
  rect 167x150 smd paste+0 mask+4.02: 1(-125.5,0) 2(125.5,0)
  silkscreen extent -184,-99 184,99, body extent -192,-99 192,99, height 150
SOIC127P600X180-16N [mm]
  rrect25% 1.31x0.62 smd: 1(-2.75,4.445) 2(-2.75,3.175) 3(-2.75,1.905) 4(-2.75,0.635) 5(-2.75,-0.635) 6(-2.75,-1.905) 7(-2.75,-3.175) 8(-2.75,-4.445) 9(2.75,-4.445) 10(2.75,-3.175) 11(2.75,-1.905) 12(2.75,-0.635) 13(2.75,0.635) 14(2.75,1.905) 15(2.75,3.175) 16(2.75,4.445)
  silkscreen extent -3.36,-5 1.78,5.73, body extent -3,-5 3,5, height 1.8
"SOIC -16" [mm] "SMD"
  rrect25% 2.05x0.59 smd: 1(-4.655,4.445) 2(-4.655,3.175) 3(-4.655,1.905) 4(-4.655,0.635) 5(-4.655,-0.635) 6(-4.655,-1.905) 7(-4.655,-3.175) 8(-4.655,-4.445) 9(4.655,-4.445) 10(4.655,-3.175) 11(4.655,-1.905) 12(4.655,-0.635) 13(4.655,0.635) 14(4.655,1.905) 15(4.655,3.175) 16(4.655,4.445)
  silkscreen extent -5.56,-5.77 3.75,5.77, body extent -5.16,-5.15 5.16,5.15, height 2.65
SOIC-8 [mm] "SMD"
  rrect50% 1.55x0.6 smd: 1(-2.7,1.905)
  rect 1.55x0.6 smd: 2(-2.7,0.635) 3(-2.7,-0.635) 4(-2.7,-1.905) 5(2.7,-1.905) 6(2.7,-0.635) 7(2.7,0.635) 8(2.7,1.905)
  silkscreen extent -2.92,-2.67 2,3.05, body extent -3,-2.46 3,2.46, height 1.75
SOP-4 [mm]
  oval 1.65x0.6 smd: 1(-3.225,1.27) 2(-3.225,-1.27) 3(3.225,-1.27) 4(3.225,1.27)
  silkscreen extent -4.82,-2 2,2, body extent -3.5,-2 3.5,2, height 2.2
SOP_8 [mm]
  rect 1.8x0.6 smd: 1(-2.825,1.905)
  oval 1.8x0.6 smd: 2(-2.825,0.635) 3(-2.825,-0.635) 4(-2.825,-1.905) 5(2.825,-1.905) 6(2.825,-0.635) 7(2.825,0.635) 8(2.825,1.905)
  silkscreen extent -4.44,-2.54 1.4,2.54, body extent -2.99,-2.45 3,2.45, height 1.6
SOT23-3 [mm] "SMD"
  rrect25% 1.23x0.6 smd paste+0 mask+0.102: 1(-1.06,0.95) 2(-1.06,-0.95) 3(1.06,0)
  silkscreen extent -0.13,-1.45 0.65,1.45, body extent -1.2,-1.45 1.2,1.45, height 1.11
SOT-23-6 [mm] "SMD"
  rect 1.15x0.6 smd: 1(-1.25,0.95) 2(-1.25,0) 3(-1.25,-0.95) 4(1.25,-0.95) 5(1.25,0) 6(1.25,0.95)
  silkscreen extent -2.52,-1.4 0,1.4, body extent -1.4,-1.45 1.4,1.45, height 1.45
SS54 [mm] "DIODE SCHOTTKY 40V 5A SMA"
  rect 2.5x1.7 smd: 1(-2.032,0) 2(2.032,0)
  silkscreen extent -3.18,-1.63 2.46,1.7, body extent -2.5,-1.36 2.5,1.34, height 2.25
SW-SMD-6X6MM [mm] "SMD"
  rect 1.55x1.3 smd: 1(-3.975,2.25) 1(3.975,2.25) 2(-3.975,-2.25) 2(3.975,-2.25)
  silkscreen extent -5.75,-2.67 2.67,2.67, body extent -4.5,-3.1 4.5,3.1, height 4.99
"TEST POINT" [mm]
  round 1.5 smd: 1(0,0)
  silkscreen extent -1.2,-1.2 1.2,1.2
TPS5430 [mm]
  rect 1.8x0.6 smd: 1(-2.85,1.88)
  oval 1.8x0.6 smd: 2(-2.85,0.61) 3(-2.85,-0.66) 4(-2.85,-1.93) 5(2.8,-1.93) 6(2.8,-0.66) 7(2.8,0.61) 8(2.8,1.88)
  rect 2.2x3.1 smd: 9(-0.025,-0.025)
  silkscreen extent -3.55,-2.16 1.52,2.92, body extent -3.02,-2.48 2.97,2.42, height 1.6
Type-C-16Pins [mm]
  rect 0.6x1.5 smd: A1(-3.202,4) A4(-2.402,4) B1(3.198,4) B4(2.398,4)
  rect 0.3x1.5 smd: A5(-1.252,4) A6(-0.252,4) A7(0.248,4) A8(-1.752,4) B5(1.748,4) B6(0.748,4) B7(-0.752,4) B8(1.248,4)
  oval 1x2.5 hole 0.7 slot 1.7 at 90 deg: SHIELD(-4.322,3.083) SHIELD(4.318,3.083)
  oval 1x2 hole 0.7 slot 1.4 at 90 deg: SHIELD(-4.322,-1.067) SHIELD(4.318,-1.067)
  round 0.65 hole 0.65 mask+0.102: SHIELD(-2.892,2.583) SHIELD(2.888,2.583)
  silkscreen extent -4.68,-4 4.69,5.43, body extent -4.47,-3.65 4.47,4.25, height 3.21
"VR 3X3" [mm]
  rect 1.2x1.2 smd mask+0.051: 1(-1,-1.6) 3(1,-1.6)
  rect 1.6x1.5 smd mask+0.051: 2(0,1.55)
  body extent -1.1,-1.56 1.1,1.25, height 0.81

## Part data
C1 C2 C3 C4 C5 C7 C8 C10 C13 C14 C15 C16 C17 C18 C19 C20 C21 C22 C23 C24 C25 C26 C27 C28 C29 C30 C31 C32 C33 C34 C35 C36 C37 C38 C39 C40 C42 C43 C44 C45 C46 C47 C48 C49 C50 C51 C52 C53 C54 C55 C56 C57 C58: library part CAPACITOR, "CAPACITOR SMD - KEMET"
C6 C11 C12: library part Alu_Capacitor
COM1: "HR911105A"
D1 D2 D5: "DIODE SCHOTTKY 40V 5A SMA", Supplier Part Number 1=08X3002, Supplier 1=Newark
D3 D4: "TVS Diode, SM712 Series, 31V Clamp, 600W Peak Pulse, Surface Mount, SOT23-3"
D6: "17.5V Clamp 12A (8/20µs) Ipp Tvs Diode Surface Mount SOT-23-6"
DC1: "Jack DC IN (Hole)"
EN1: "Bourns PEC11R-4015F-S0024"
F1 F2 F3 F4: "Fuse Resettable 30V/0.2A; Size 4.55 x 3.24mm"
FR1: library part "Ferrite Beads", "SMD"
Fuse1: library part Fuse, "Nano2 SMD FF submin fuse w/holder, 4A"
KF1 KF2: "KF Terminal Block Plug-in"
L1 L2: library part Inductor_1_SMD
LCD1: "Character LCD, 16x4, LED backlight."
LED1 LED2 LED3 LED4 LED5 LED10 LED11 LED12 LED13 LED14 LED15: library part LED_SMD, "LED SMD"
MH1 MH3 MH4: "Mounting hole"
Q6 Q7: "Bipolar (BJT) Transistor NPN 25 V 1.5 A 100MHz 300 mW Surface Mount SOT-23-3"
R1 R2 R3 R4 R5 R6 R7 R8 R9 R10 R11 R12 R13 R14 R15 R16 R17 R18 R19 R20 R21 R22 R23 R24 R25 R26 R27 R28 R29 R30 R31 R32 R33 R34 R35 R36 R37 R38 R39 R40 R41 R42 R43 R44 R45 R46 R47 R48 R49 R50 R51 R55 R56 R61 R62 R65 R66 R68 R69 R70 R72 R74 R75 R76 R77 R78 R79 R80 R81 R82 R83: library part RESISTOR, "Resistor SMD - YAGEO"
SW1: "Switch 3 Pins"
SW2 SW8 SW9: "SMD Button", Supplier Part Number 1=35AH5160, Supplier 1=Newark
SW3: "Switch DIP ON OFF SPST 3 Flush Slide 0.1A 20VDC Gull Wing 2000Cycles 2.54mm SMD T/R"
SW5 SW6 SW7: "DIP Button 4 Pins"
TP1 TP2 TP3 TP4 TP5 TP6 TP8 TP10 TP11 TP14 TP15: library part "TEST POINT", "Test Point", Supplier Part Number 1=36-5014-ND, Supplier 1=Digikey
U1: "Buck DC to DC Converter"
U2: "Buck Converter"
U3: "Isolated - Converter"
U4: "Hardwired TCP/IP embedded Ethernet controller"
U5 U10: "1/1 Transceiver Half RS422, RS485"
U6 U7 U8 U9 U11 U12: "TLP185 Optoisolator Transistor Output 3750Vrms 1 Channel 4-SOP"
U13: "EEPROM Memory IC 256Kb (32K x 8), I2C Protocol"
U14: "Extremely Accurate I²C-Integrated RTC/TCXO/Crystal"
U15: "Bluetooth, WiFi 802.11b/g/n, Bluetooth v5.0 Transceiver Module 2.4GHz Antenna Not Included, U.FL Surface Mount"
U16: "USB to serial chip CH340"
USB1: "Type 16 Pins (Include 4 GND Pins)"
VBAT1: library part "Battery Base", "Battery Base CR2032"
VR1: library part "VARIABLE RESISTOR", "VR"
X1: "SMD CRYSTAL", Supplier Part Number 1=ECS-80-8-33Q-ADS, Supplier 1=Avnet

## Via types
v1: diameter 0.6/0.6 (per signal layer), hole 0.3, Top Layer to Bottom Layer, 276 vias
v2: diameter 0.6, hole 0.3, Top Layer to Bottom Layer, tented both sides, 94 vias
v3: diameter 0.254/0.254 (per signal layer), hole 0.17, Top Layer to Bottom Layer, 49 vias
v4: diameter 0.6, hole 0.3, Top Layer to Bottom Layer, 13 vias

## Nets (pads, with @x,y where several pads share a name; then routed paths per layer and width w, separated by ;. In a path a pad name is that pad's centre, name@x,y a point inside that pad or via, vN(x,y) a via of type N, cw(c..) or ccw(c..) an arc to the next point about the centre after c; other vN are vias at no path point)
3V3_SCL: R30.1 U13.6 U14.16 U15.5 | length 46.4
  Top Layer w0.4: U15.5@47.722,55.259 47.972,55.009 47.972,53.882 60.693,41.161 R30.1@66.294,41.161 67.125,41.161 67.98,40.306 69.212,40.306 U14.16@69.259,40.259 71.394,40.259 71.628,40.493 71.628,54.53 71.862,54.764 72.892,54.764 U13.6@72.992,54.864
3V3_SDA: R51.1 U13.5 U14.15 U15.4 | length 43.7
  Top Layer w0.4: U15.4@48.992,55.259 49.18,55.071 49.18,54.198 58.941,44.437 66.219,44.437 R51.1@66.294,44.362 ; R51.1@66.294,44.437 R51.1@66.294,44.362 ; U14.15@69.259,41.529 69.164,41.624 68.358,41.624 67.347,42.635 ; U13.5@72.992,56.134 71.374,56.134 67.347,52.107 67.347,42.635 ; R51.1@66.294,44.362 66.336,44.32 66.336,43.646 67.347,42.635
+3.3V: C1.1 C2.1 C3.1 C4.1 C11.1 C16.2 C17.2 C35.2 C36.2 C37.2 C38.2 C52.2 C53.2 C54.2 C55.2 FR1.1 J1.10 L2.2 R3.1 R9.1 R10.2 R11.2 R25.1 R26.2 R27.2 R28.2 R30.2 R31.1 R32.1 R34.2 R36.2 R40.2 R42.2 R45.2 R47.2 R51.2 R61.1 R65.2 R66.2 R68.2 R69.2 R70.2 R72.1 R74.2 R77.1 R78.1 R81.1 TP5.1 TP14.1 TP15.1 U2.3 U4.28 U13.8 U14.2 U15.2 U16.16 | length 412
  Top Layer w0.295: v2@14.478,52.788 14.846,53.156 U4.28@14.846,54.261
  Top Layer w0.38: v2(17.145,41.402) 19.571,38.976 R78.1@19.571,31.496 v2(24.13,31.496) ; R11.2@26.543,51.448 26.778,51.213 27.146,51.213 28.226,50.133 28.594,50.133 R31.1@28.829,49.898
  Top Layer w0.4: FR1.1@7.239,49.275 7.609,49.645 7.989,49.645 8.509,50.165 8.612,50.165 9.406,50.959 9.544,50.959 R9.1@9.779,51.194 9.906,51.321 C17.2@12.065,51.321 ; C17.2@12.065,51.181 C16.2@14.351,51.181 ; C16.2@14.478,51.321 v2(14.478,52.705) v2@14.478,52.788 ; v2(24.511,54.864) 26.543,52.832 R11.2@26.543,51.448 ; R25.1@26.15,92.482 26.4,92.232 26.477,92.232 26.635,92.075 27.269,92.075 28.186,91.157 28.186,91.132 28.411,90.907 R32.1@28.436,90.907 ; R32.1@28.448,90.735 28.663,90.95 29.283,90.95 29.591,91.257 29.591,91.821 30.002,92.232 R28.2@30.497,92.232 ; R28.2@30.472,92.207 30.472,92.232 R28.2@30.497,92.232 ; 32.513,92.457 R28.2@30.722,92.457 R28.2@30.497,92.232 ; v2(70.104,33.147) 70.11,33.153 71.114,33.153 R40.2@71.12,33.16 R36.2@72.771,33.16 72.714,33.217 72.714,34.653 72.696,34.671 72.696,34.759 R45.2@72.657,34.798 ; v2(77.216,41.529) U14.2@78.569,41.529 80.783,41.529 81.121,41.867 81.121,41.892 81.396,42.167 C53.2@81.421,42.167 ; C53.2@81.407,42.18 81.407,44.183 82.347,44.183 84.274,46.111 85.087,46.111 R61.1@85.09,46.114 85.157,46.047 85.906,46.047 87.135,44.818 87.135,35.687 87.146,35.676 87.146,34.314 v2(87.122,34.29) 87.16,34.252 87.16,33.376 R42.2@87.249,33.287 R42.2@87.274,33.287 ; R47.2@90.5,31.339 90.602,31.238 92.305,31.238 v4(92.343,31.2)
  Top Layer w0.6: TP15.1@15.875,15.113 15.989,14.999 R74.2@20.701,14.999 R74.2@20.955,14.999 ; R10.2@17.653,51.448 17.778,51.323 18.781,51.323 v2(18.796,51.308) ; 21.222,15.113 21.279,15.056 ; v2(23.876,27.559) 23.251,26.934 22.699,26.934 22.679,26.914 22.184,26.914 22.174,26.904 21.951,26.904 21.279,26.232 21.279,15.056 ; v2(24.511,61.976) 24.511,62.611 26.162,64.262 26.162,86.106 28.448,88.392 R32.1@28.448,90.735 ; R25.1@26.15,92.457 26.15,92.482 R25.1@26.15,92.532 ; 32.513,92.457 R27.2@33.008,92.457 R26.2@35.421,92.457 37.337,92.457 v2(45.593,84.201) ; 33.782,13.83 33.807,13.83 35.318,12.319 47.879,12.319 ; R70.2@47.879,13.827 47.879,12.319 ; R69.2@48.006,26.175 48.006,27.573 ; R77.1@49.162,59.817 C55.2@51.422,59.817 ; v2(49.911,77.978) TP14.1@49.911,65.659 51.448,64.122 51.474,64.122 52.718,62.878 ; U15.2@51.411,55.259 51.411,55.388 U15.2@51.532,55.509 ; C55.2@51.422,59.573 C54.2@51.422,57.531 51.422,57.15 51.532,57.04 U15.2@51.532,55.509 ; C55.2@51.422,59.69 C55.2@51.422,59.817 ; U15.2@51.682,55.109 U15.2@51.532,55.259 U15.2@51.532,55.509 ; C11.1@55.118,63.24 54.756,62.878 52.718,62.878 ; R34.2@56.134,33.795 56.134,33.87 56.059,33.795 54.242,33.795 52.07,31.623 52.07,27.573 ; C3.1@59.83,59.944 C4.1@62.217,59.944 62.217,62.214 63.092,63.089 63.719,63.089 66.294,60.514 ; R3.1@63.767,57.658 65.493,57.658 TP5.1@66.255,58.42 ; R30.2@66.294,39.611 66.319,39.611 66.444,39.486 66.444,39.461 67.17,38.735 72.263,38.735 74.549,41.021 v2(74.549,42.926) 75.819,44.196 75.819,52.324 ; R51.2@66.294,45.987 TP5.1@66.294,58.42 66.294,60.514 ; U13.8@72.992,52.324 75.819,52.324 ; 21.279,15.056 21.336,14.999 R81.1@22.987,14.999 R65.2@25.273,14.999 R72.1@27.432,14.999 29.464,14.999 35.56,21.095 35.56,27.079 36.054,27.573 48.006,27.573 ; 47.879,12.319 51.562,12.319 52.07,12.827 52.07,27.573 ; 48.006,27.573 52.07,27.573 ; C55.2@51.422,59.817 C55.2@51.422,59.944 51.422,61.582 52.718,62.878 ; 66.294,60.514 70.208,60.514 70.677,60.046 70.677,59.257 C37.2@70.752,59.182 C38.2@73.266,59.182 73.441,59.007 73.441,58.766 75.819,56.388 75.819,52.324
  Bottom Layer w0.38: v2(14.478,52.705) 14.52,52.663 14.748,52.663 17.145,50.266 ; v2(17.145,41.402) 17.145,50.266 ; v2(24.511,54.864) 20.955,51.308 v2(18.796,51.308) 18.736,51.308 18.292,50.863 17.742,50.863 17.145,50.266
  Bottom Layer w0.4: v2(24.511,54.864) v2(24.511,61.976) ; v2(70.104,33.147) 71.247,34.29 v2(87.122,34.29) 87.16,34.252 87.16,34.097 90.057,31.2 v4(92.343,31.2) ; C35.2@74.136,41.899 74.435,42.198 74.511,42.198 74.511,42.888 v2(74.549,42.926) ; C35.2@74.536,41.912 C36.2@76.409,41.912 ; C36.2@76.435,41.841 76.627,41.648 77.043,41.648 77.162,41.529 v2(77.216,41.529)
  Bottom Layer w0.6: v2(23.876,27.559) 23.876,27.619 24.13,27.873 v2(24.13,31.496) ; J1.10@30.734,78.105 30.861,77.978 v2(49.911,77.978) 49.911,79.883 v2(45.593,84.201)
+3.3V_RJ45: C18.2 C19.2 C20.2 C21.2 C22.2 C23.2 FR1.2 R8.1 R16.2 R17.2 R19.1 U4.4 U4.8 U4.11 U4.15 U4.17 U4.21 | length 66.4
  Top Layer w0.295: C18.2@7.887,55.372 v2(8.89,55.372) ; C23.2@7.887,58.801 7.903,58.817 C23.2@7.903,59.182 ; C23.2@7.887,59.182 C23.2@7.903,59.182 ; v2@8.89,55.245 9.779,56.134 9.779,57.15 10.452,57.823 U4.21@11.916,57.823 ; R19.1@11.811,66.916 11.879,66.848 v2(11.879,65.532) ; U4.17@11.916,59.823 10.166,59.823 9.525,59.182 v2(8.89,59.182) C23.2@7.903,59.182 ; U4.15@11.916,60.823 10.668,60.823 ; U4.11@13.846,63.253 13.846,64.513 12.827,65.532 v2(11.879,65.532) ; U4.8@15.346,63.253 15.346,65.511 v2(15.367,65.532) ; U4.4@17.346,63.253 17.346,65.053 17.951,65.659 v2(18.034,65.659) ; C23.2@7.903,59.182 7.903,60.563 8.163,60.823 10.668,60.823 ; 10.668,60.823 10.668,64.321 v2(11.879,65.532)
  Top Layer w0.38: FR1.2@7.239,51.055 7.619,51.435 8.001,51.435 10.245,53.679 10.245,54.441 v2(10.287,54.483) ; v2(24.638,65.532) 24.638,66.681 24.675,66.718 R16.2@24.764,66.718
  Top Layer w0.4: R8.1@4.826,51.194 4.895,51.125 7.17,51.125 FR1.2@7.239,51.055
  Bottom Layer w0.38: v2(8.89,59.182) v2(8.89,55.372) 8.89,55.245 9.61,54.525 10.245,54.525 v2(10.287,54.483) ; v2@11.777,65.532 17.847,65.532 17.974,65.659 v2(18.034,65.659) 18.034,65.719 17.653,66.1 C19.2@17.653,68.313 ; C20.2@13.843,68.313 C21.2@15.748,68.313 C19.2@17.653,68.313 ; v2@24.511,65.532 22.11,65.532 19.329,68.313 C19.2@17.653,68.313
+5V: C10.1 C12.1 C13.1 C42.2 C43.2 D5.2 J1.9 L1.2 LCD1.2 LCD1.15 R2.1 R5.1 R62.1 TP6.1 U2.1 U3.2 VR1.1 | length 284.2
  Top Layer w0.6: v2(18.669,9.271) 50.673,9.271 53.213,11.811 53.213,26.543 56.473,29.803 90.085,29.803 93.044,26.844 93.62,26.844 U3.2@93.794,26.67
  Top Layer w0.8: D5.2@7.493,30.988 v2(9.906,30.988) ; LCD1.15@49.022,89.662 49.022,91.186 49.87,92.034 C42.2@50.419,92.034 ; C42.2@50.419,92.062 C43.2@52.832,92.062 62.992,92.062 65.092,94.162 79.955,94.162 80.645,93.472 80.645,92.71 81.572,91.783 81.791,91.783 VR1.1@81.991,91.583 81.953,91.545 81.953,89.827 LCD1.2@81.915,89.789 ; v4(51.435,73.025) 54.87,73.025 C12.1@54.991,73.146 ; 59.728,73.099 R2.1@59.728,81.839 TP6.1@62.195,81.839 62.195,81.906 v2(63.017,82.728) ; U2.1@68.676,68.707 70.447,68.707 71.971,70.231 75.184,70.231 76.708,68.707 76.708,60.579 77.851,59.436 87.516,59.436 ; R62.1@87.516,56.642 87.516,59.436 ; U3.2@93.794,26.67 93.986,26.67 94.34,27.024 94.372,27.024 95.282,27.934 95.282,36.303 93.612,37.973 93.612,55.867 90.043,59.436 87.516,59.436
  Top Layer w1: 56.54,73.399 56.84,73.099 59.728,73.099 L1.2@63.525,73.099
  Bottom Layer w0.5: v2(62.992,92.075) 62.992,92.048 62.877,91.933 62.877,82.895 63.017,82.755 v2(63.017,82.728)
  Bottom Layer w0.8: 10.118,30.649 18.669,22.098 v2(18.669,9.271) ; J1.9@30.607,75.438 J1.9@30.734,75.565 48.895,75.565 v4(51.435,73.025)
+5V_RS485: C14.1 C31.1 C32.1 C33.1 C34.1 R33.2 R35.2 R37.2 R41.2 R43.2 R44.2 R46.2 R48.2 R55.1 R56.1 TP11.1 U3.3 U5.8 U10.8 | length 58
  Top Layer w0.6: 67.084,18.954 67.421,18.617 67.446,18.617 67.446,20.115 68.97,20.115 68.97,18.617 ; R41.2@69.977,18.555 71.107,18.555 v2(71.12,18.542) ; R56.1@71.12,14.745 v2(71.12,15.875) ; U10.8@82.042,18.73 82.042,18.923 v2(82.931,18.923) 83.312,18.923 ; R44.2@83.82,18.605 83.795,18.605 R44.2@83.67,18.73 ; R44.2@83.851,18.611 83.731,18.73 R44.2@83.67,18.73 ; 85.471,18.605 85.471,20.815 ; R43.2@86.07,18.503 86.07,18.578 86.088,18.596 86.088,20.797 86.07,20.815 85.471,20.815 ; 83.312,18.923 83.82,19.431 R37.2@83.82,20.815 85.471,20.815 ; 83.312,18.923 83.477,18.923 R44.2@83.67,18.73
  Top Layer w0.8: R55.1@87.249,14.745 87.274,14.745 87.299,14.77 87.299,15.29 89.274,17.265 90.736,17.265 91.027,17.557 TP11.1@91.027,17.722 ; TP11.1@91.059,17.399 91.059,19.177 89.903,20.333 C14.1@88.265,20.333 v2(88.265,21.257) 91.138,24.13 U3.3@93.794,24.13
  Bottom Layer w0.6: v2(71.12,15.875) v2(71.12,18.542) 71.313,18.735 71.707,18.735 C34.1@71.882,18.91 ; C34.1@72.288,18.922 C33.1@73.986,18.922 83.312,18.922 ; v2(82.931,18.923) 83.912,18.923 C32.1@83.947,18.958 ; C32.1@84.328,18.783 85.915,18.783 85.916,18.784 87.151,18.784 88.265,19.898 v2(88.265,21.257)
+VCC: C6.1 C7.1 C8.1 Fuse1.2 R1.1 R4.1 TP8.1 U1.7 | length 18.1
  Top Layer w0.6: U1.7@73.564,76.962 75.299,76.962 75.542,76.719 R4.1@75.717,76.719
  Top Layer w0.8: R1.1@84.283,61.602 85.496,61.602 ; Fuse1.2@85.496,65.189 85.496,61.602 ; TP8.1@86.868,61.468 86.734,61.602 85.496,61.602
  Top Layer w1: C6.1@79.019,71.685 C6.1@79.019,71.812 ; C6.1@79.273,72.32 79.273,71.497 83.579,67.191 83.964,67.191 85.369,65.786 Fuse1.2@85.369,65.57
A1: F2.2 KF1.2 | length 7.2
  Top Layer w1: F2.2@58.107,14.268 58.107,11.235 58.928,10.414 KF1.2@61.976,10.414
A2: F4.2 KF2.2 | length 4.4
  Top Layer w1: F4.2@74.481,14.224 74.731,13.974 74.731,12.024 75.946,10.809 KF2.2@75.946,10.414
B1: F1.2 KF1.1 | length 3.8
  Top Layer w1: 68.453,11.176 68.58,11.303 68.58,13.247 68.58,14.038 F1.2@68.521,14.097 F1.2@68.521,13.247
B2: F3.2 KF2.1 | length 7.3
  Top Layer w1: KF2.1@81.026,10.414 84.201,10.414 84.904,11.117 F3.2@84.904,14.224
CC1: R83.1 USB1.A5 | length 5.2
  Top Layer w0.254: USB1.A5@8.191,22.461 9.652,22.461 11.067,23.876 R83.1@12.814,23.876
CC2: R82.1 USB1.B5 | length 5.1
  Top Layer w0.254: USB1.B5@8.191,19.461 9.495,19.461 10.414,18.542 R82.1@12.941,18.542
DATA_D_N: D6.3 D6.4 U16.6 USB1.A7 USB1.B7 | length 13.2
  Top Layer w0.27: USB1.B7@8.191,21.961 6.889,21.961 6.731,21.803 6.731,21.119 6.889,20.961 USB1.A7@8.191,20.961 10.154,20.961 10.856,20.259 D6.3@11.831,20.259 16.529,20.259 16.844,20.574 U16.6@17.189,20.574
DATA_D_P: D6.1 D6.6 U16.5 USB1.A6 USB1.B6 | length 14.3
  Top Layer w0.254: USB1.B6@8.191,20.461 9.511,20.461 v2(10.541,19.431)
  Top Layer w0.27: USB1.A6@8.191,21.461 10.158,21.461 v2(10.541,21.844) 10.56,21.844 10.875,22.159 D6.6@14.056,22.159 ; D6.6@14.331,22.159 16.529,22.159 16.844,21.844 U16.5@17.189,21.844
  Bottom Layer w0.27: v2(10.541,19.431) v2(10.541,21.844)
DEBUG_EN: C56.2 R74.1 R75.1 SW8.2 U15.3 | length 92.9
  Top Layer w0.4: SW8.2@10.922,11.245 11.122,11.445 11.122,11.884 12.7,13.462 v2@19.939,13.462 ; v2(19.685,13.462) 20.688,13.462 R74.1@20.701,13.449 ; v2(25.4,27.432) 25.454,27.432 25.708,27.686 28.944,27.686 30.006,26.624 30.539,26.624 R75.1@30.734,26.429 ; v2(49.048,58.484) 49.028,58.464 49.028,57.156 49.035,57.15 49.035,57.125 49.31,56.85 49.335,56.85 50.012,56.173 50.012,55.28 U15.3@50.056,55.237 ; U15.3@50.183,54.729 U15.3@50.187,54.724
  Bottom Layer w0.4: v2@19.939,13.462 19.939,25.781 20.32,26.162 ; v2(25.4,27.432) 24.13,26.162 20.32,26.162 ; v2(49.048,58.484) 49.048,45.492 40.64,37.084 24.765,37.084 20.701,33.02 20.701,26.543 20.32,26.162